# EAGLE board hexapod_mk2_v0.0 (EAGLE 9.6.2)
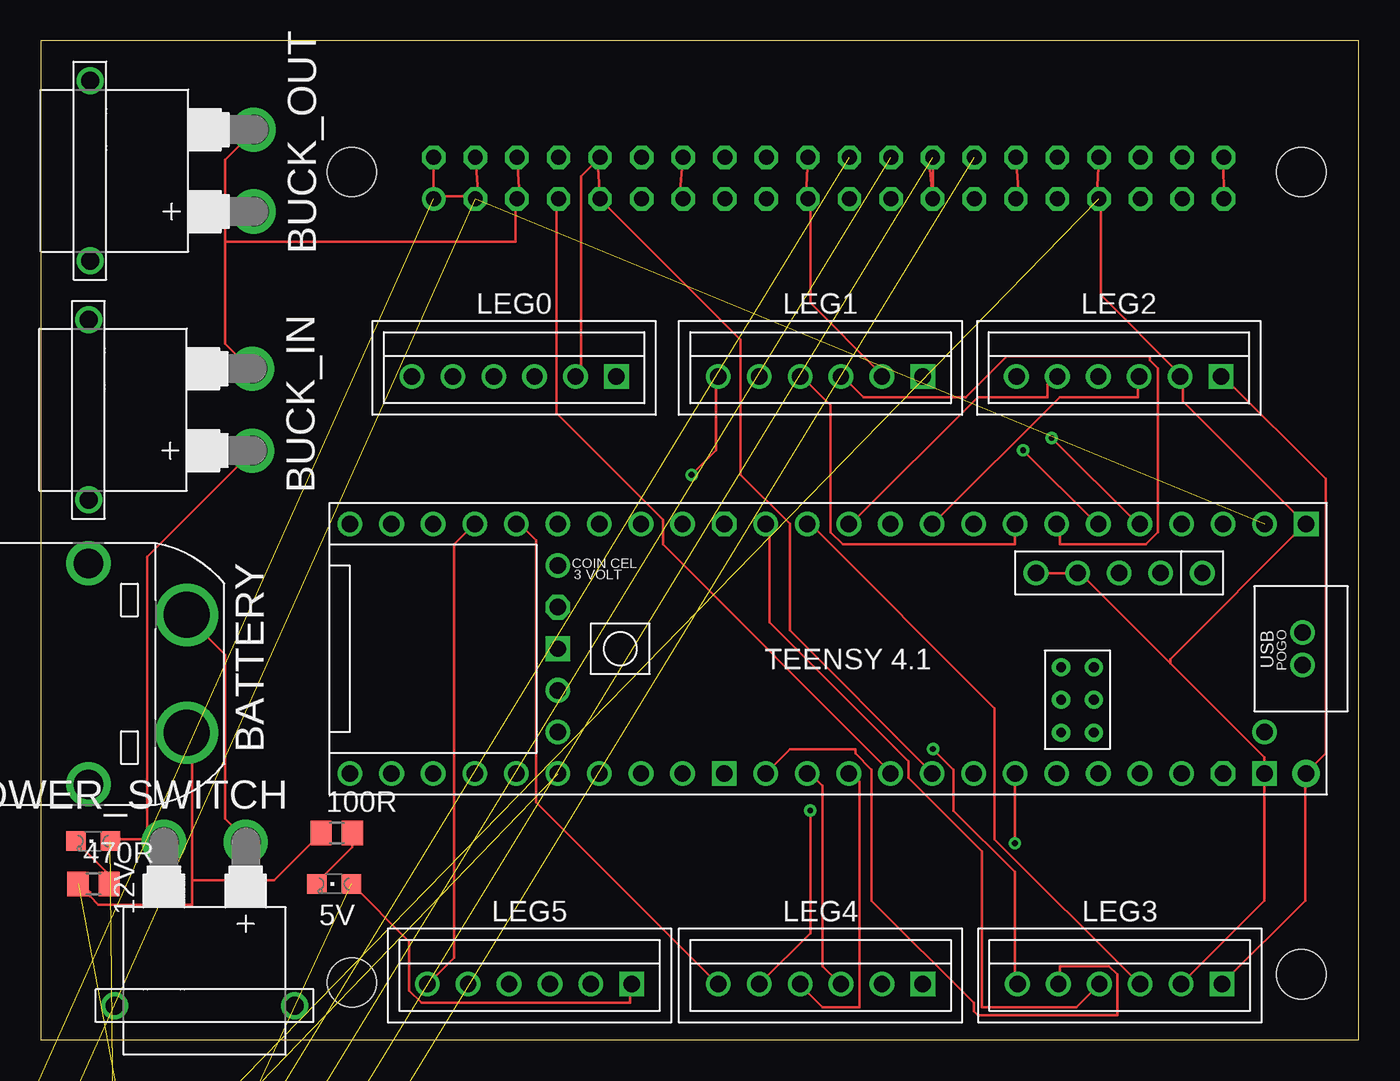
[diagram p0: board, top side]
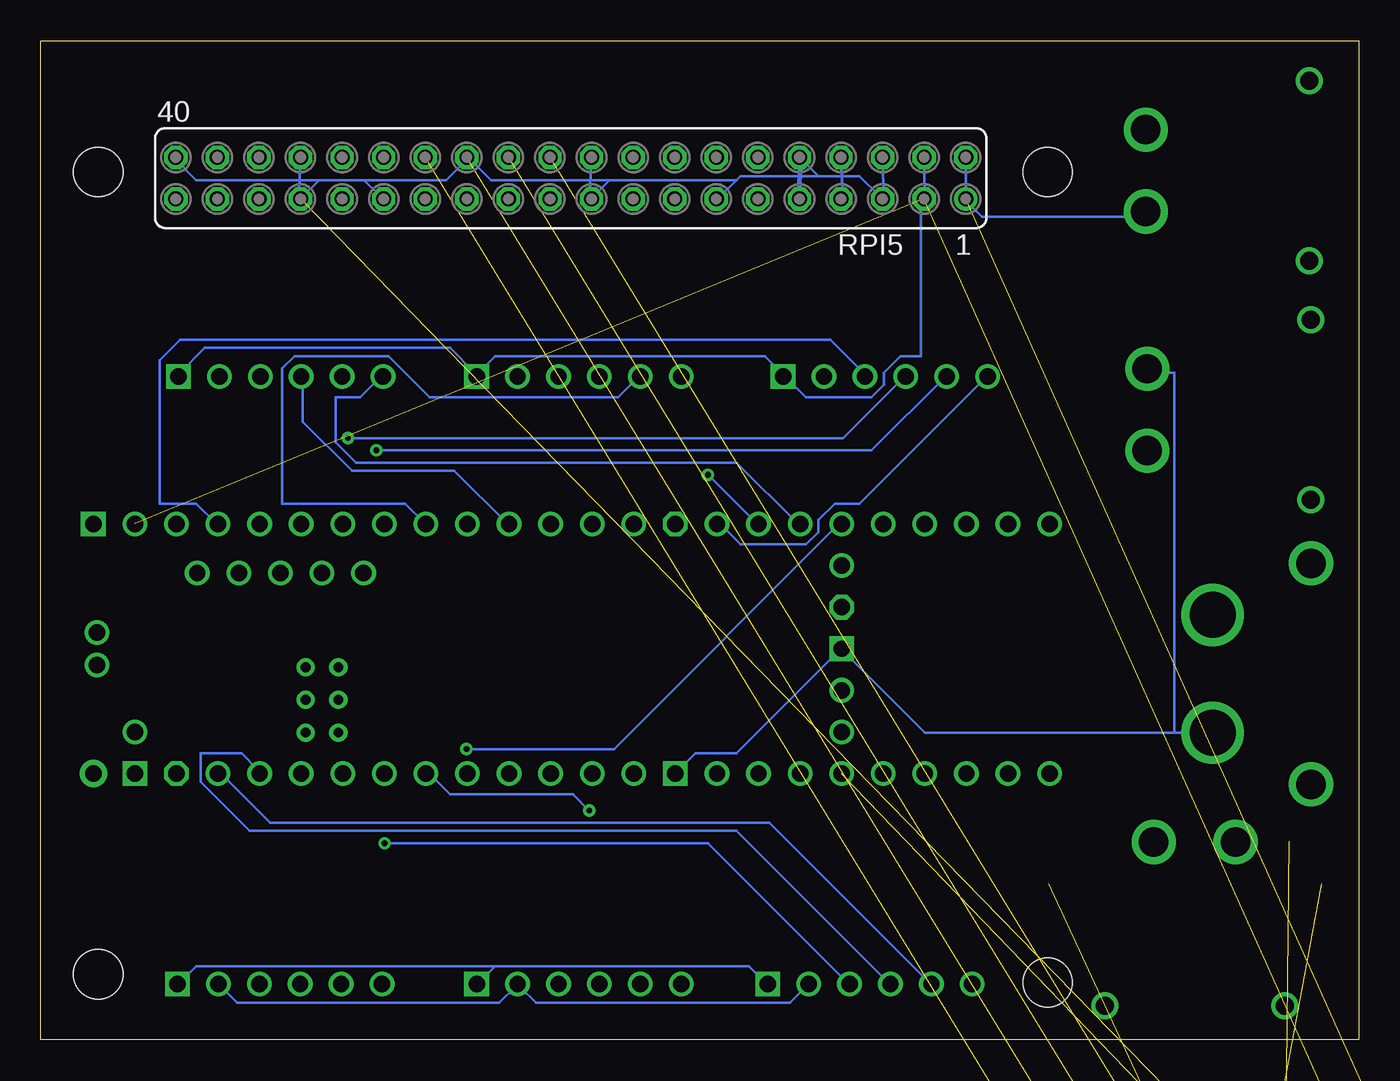
[diagram p1: board, bottom side, seen from below]

Size 80.5 x 61 mm. Coordinates in mm from the lower left corner, seen from the top.
Outline: 0,0 80.5,0 80.5,61 0,61 0,0
Copper layers (1*16): Top 0.035mm / dielectric 1.5mm / Bottom 0.035mm
Design rules "default": minimum track width 6mil, minimum drill 0.35mm, track to track 6mil, track to pad 6mil, pad to pad 6mil, via to via 6mil, smd to smd 6mil, copper to edge 40mil, drill to drill 6mil, minimum pad ring 10mil, minimum via ring 8mil, stop-mask expansion 4mil, vias tented up to drill 0mil, thermal gap 10mil
Net classes: 0 default: clearance 0.205 mm
Holes 3 mm at 19,53 19,3.5 77,53 77,4

## Footprints (pad centres in the part's own frame; a part is rotated, then mirrored left to right if it is on the bottom)
CHIPLED_0805 = smd 1.2 x 1.2: A 0,-1.05; C 0,1.05
R0805 = smd 1.3 x 1.5: 1 -0.95,0; 2 0.95,0
XT60PW-M = drill 2.8: + 3.6,0; - -3.6,0 | drill 1.8: P$3 -6.75,6; P$4 6.75,6
XT30PW-M = drill 1.8: + -2.5,0; - 2.5,0 | drill 1.1: P$3 -5.5,10; P$4 5.5,10
B3B-XH = drill 1 square: P$1 2.5,0 | drill 1: P$2 0,0; P$3 -2.5,0
B6B-XH = drill 1 square: P$1 6.25,0 | drill 1: P$2 3.75,0; P$3 1.25,0; P$4 -1.25,0; P$5 -3.75,0; P$6 -6.25,0
MPM_VIS = smd 0.584 x 0.965: 1 -1.003,-1.118; 2 1.003,-1.118; 3 0,1.118
FE20-2 = drill 0.914: 1 -24.13,1.27 | drill 0.914 octagon: 2 -24.13,-1.27; 3 -21.59,1.27; 4 -21.59,-1.27; 5 -19.05,1.27; 6 -19.05,-1.27; 7 -16.51,1.27; 8 -16.51,-1.27; 9 -13.97,1.27; 10 -13.97,-1.27; 11 -11.43,1.27; 12 -11.43,-1.27; 13 -8.89,1.27; 14 -8.89,-1.27; 15 -6.35,1.27; 16 -6.35,-1.27; 17 -3.81,1.27; 18 -3.81,-1.27; 19 -1.27,1.27; 20 -1.27,-1.27; 21 1.27,1.27; 22 1.27,-1.27; 23 3.81,1.27; 24 3.81,-1.27; 25 6.35,1.27; 26 6.35,-1.27; 27 8.89,1.27; 28 8.89,-1.27; 29 11.43,1.27; 30 11.43,-1.27; 31 13.97,1.27; 32 13.97,-1.27; 33 16.51,1.27; 34 16.51,-1.27; 35 19.05,1.27; 36 19.05,-1.27; 37 21.59,1.27; 38 21.59,-1.27; 39 24.13,1.27; 40 24.13,-1.27
SMS-004 = smd 1.092 x 2.007: 1 -3.81,-4.496; 2 -1.27,-4.496; 3 1.27,-4.496; 4 3.81,-4.496; 5 3.81,4.496; 6 1.27,4.496; 7 -1.27,4.496; 8 -3.81,4.496
TEENSY41 = drill 1: 0-RX1/CS1/CRX2 -27.94,-7.62; 1-TX1/MISO1/CTX2 -25.4,-7.62; 2-OUT2 -22.86,-7.62; 3-LRCLK2 -20.32,-7.62; 4-BCLK2 -17.78,-7.62; 5-IN2 -15.24,-7.62; 6-OUT1D -12.7,-7.62; 7-RX2/OUT1A -10.16,-7.62; 8-TX2/IN2 -7.62,-7.62; 9-OUT1C -5.08,-7.62; 10-CS\MQSR -2.54,-7.62; 11-MOSI/CTX1 0,-7.62; 12-MISO/MQSL 2.54,-7.62; 13-SCK/LED 2.54,7.62; 14-A0/TX3/SPDIF_OUT 0,7.62; 15-A1/RX3/SPDIF_IN -2.54,7.62; 16-A2/RX4/SCL1 -5.08,7.62; 17-A3/TX4/SDA1 -7.62,7.62; 18-A4/SDA0 -10.16,7.62; 19-A5/SCL0 -12.7,7.62; 20-A6/TX5/LRCLK1 -15.24,7.62; 21-A7/RX5/BCLK1 -17.78,7.62; 22-A8/CTX1 -20.32,7.62; 23-A9/CRX1/MCLK1 -22.86,7.62; 24-A10/TX6/SCL2 7.62,-7.62; 25-A11/RX6/SDA2 10.16,-7.62; 26-A12/MOSI1 12.7,-7.62; 27-A13/SCK1 15.24,-7.62; 28-RX7 17.78,-7.62; 29-TX7 20.32,-7.62; 30-CRX3 22.86,-7.62; 31-CTX3 25.4,-7.62; 32-OUT1B 27.94,-7.62; 33-MCLK2 27.94,7.62; 34-RX8 25.4,7.62; 35-TX8 22.86,7.62; 36-PWM 20.32,7.62; 37-PWM 17.78,7.62; 38-A14/CS/IN1 15.24,7.62; 39-A15/CS/OUT1A 12.7,7.62; 40-A16/CS1 10.16,7.62; 41-A17/MISO1 7.62,7.62; +5V -24.13,-4.62; D+ -30.25,-1; D- -30.25,1; DM -21.59,-4.62; DP -19.05,-4.62; GND4 -16.51,-4.62; GND5 -13.97,-4.62; ON/OFF 15.24,5.08; PROGRAM 15.24,2.54; VBAT 15.24,-5.08; VUSB -27.94,5.08 | drill 1 octagon: 3V3-1 5.08,-7.62; 3V3-2 15.24,-2.54; 3V3-3 -25.4,7.62 | drill 0.6: G -15.51,3.12; LED -17.51,3.12; R+ -17.51,5.12; R- -15.51,5.12; T+ -15.51,1.12; T- -17.51,1.12 | drill 1 square: GND1 -30.48,-7.62; GND2 15.24,0; GND3 5.08,7.62; GND6 -27.94,7.62 | drill 1 pad 1.676: VIN -30.48,7.62
JST-XH-02-PACKAGE-LONG-PAD = drill 1.016 long: 1 -1.27,0; 2 1.27,0

## Placement (x,y rotation side)
5V  Red  [CHIPLED_0805]  17.91,9.52 90 top
12V  Blue  [CHIPLED_0805]  3.19,12.13 90 top
100R  100  [R0805]  18.07,12.63 0 top
470R  470  [R0805]  3.22,9.52 0 top
BATTERY  XT60PW-M  [XT60PW-M]  8.91,22.35 90 top
BUCK_IN  XT30PW-M  [XT30PW-M]  12.91,38.48 90 top
BUCK_OUT  XT30PW-M  [XT30PW-M]  13,53.08 90 top
LED_RING  03-JST-B3B-XH-A  [B3B-XH]  -15,-33 0 top  (outside the outline)
LEG0  06-JST-B6B-XH-A  [B6B-XH]  28.91,40.51 0 top
LEG1  06-JST-B6B-XH-A  [B6B-XH]  47.63,40.51 0 top
LEG2  06-JST-B6B-XH-A  [B6B-XH]  65.85,40.51 0 top
LEG3  06-JST-B6B-XH-A  [B6B-XH]  65.91,3.4 0 top
LEG4  06-JST-B6B-XH-A  [B6B-XH]  47.63,3.4 0 top
LEG5  06-JST-B6B-XH-A  [B6B-XH]  29.85,3.4 0 top
POWER_SWITCH  XT30PW-M  [XT30PW-M]  10.01,12.08 180 top
R1  MPMT10014001AT1MPM_VIS  [MPM_VIS]  5.5,-12 0 top  (outside the outline)
RPI5  Raspberry Pi  [FE20-2]  48.13,52.62 180 bottom
S1  SWS004  [SMS-004]  -2,-32 0 top  (outside the outline)
U$1  TEENSY41  [TEENSY41]  46.82,23.88 180 top
X1  JST-XH-02-PIN-LONG-PAD  [JST-XH-02-PACKAGE-LONG-PAD]  -17,-43 0 top  (outside the outline)

## Library data of the parts
5V 12V = led
100R 470R = rcl; SPICEPREFIX: R
BATTERY BUCK_IN BUCK_OUT POWER_SWITCH = amass
LED_RING LEG0 LEG1-LEG5 = bt_con-jst-xh
R1 = MPMT10014001AT1; COPYRIGHT: Copyright (C) 2024 Ultra Librarian. All rights reserved.; MANUFACTURER_PART_NUMBER: MPMT10014001AT1; MFR_NAME: Vishay
RPI5 = con-lsta; OC_FARNELL: unknown; OC_NEWARK: unknown
S1 = smd-special
U$1 = teensy
X1 = Rembrandt Electronics - JST XH Connectors v1-0

## Nets
3.3V: RPI5.1 X1.1
5V: 5V.A BUCK_OUT.+ LED_RING.P$1 LEG0.P$1 LEG1.P$1 LEG2.P$1 LEG3.P$1 LEG4.P$1 LEG5.P$1 RPI5.2 RPI5.4 S1.5 S1.6 S1.7 S1.8 U$1.VIN
12V: 12V.A BUCK_IN.+ POWER_SWITCH.- R1.1
12V_PRE: BATTERY.+ POWER_SWITCH.+
D_SW0: RPI5.22 S1.1
D_SW1: RPI5.24 S1.2
D_SW2: RPI5.26 S1.3
D_SW3: RPI5.28 S1.4
GND: 100R.1 470R.1 BATTERY.- BUCK_IN.- BUCK_OUT.- LED_RING.P$2 LEG0.P$2 LEG1.P$2 LEG2.P$2 LEG3.P$2 LEG4.P$2 LEG5.P$2 R1.2 RPI5.6 RPI5.9 RPI5.14 RPI5.20 RPI5.25 RPI5.30 RPI5.34 RPI5.39 U$1.GND1 U$1.GND2 U$1.GND3 U$1.GND4 U$1.GND5 U$1.GND6
L0M1: LEG0.P$3 U$1.2-OUT2
L0M2: LEG0.P$4 U$1.3-LRCLK2
L0M3: LEG0.P$5 U$1.4-BCLK2
L0SIG: LEG0.P$6 U$1.24-A10/TX6/SCL2
L1M1: LEG1.P$3 U$1.5-IN2
L1M2: LEG1.P$4 U$1.6-OUT1D
L1M3: LEG1.P$5 U$1.7-RX2/OUT1A
L1SIG: LEG1.P$6 U$1.25-A11/RX6/SDA2
L2M1: LEG2.P$3 U$1.8-TX2/IN2
L2M2: LEG2.P$4 U$1.9-OUT1C
L2M3: LEG2.P$5 U$1.10-CS\MQSR
L2SIG: LEG2.P$6 U$1.26-A12/MOSI1
L3M1: LEG3.P$3 U$1.11-MOSI/CTX1
L3M2: LEG3.P$4 U$1.12-MISO/MQSL
L3M3: LEG3.P$5 U$1.13-SCK/LED
L3SIG: LEG3.P$6 U$1.27-A13/SCK1
L4M1: LEG4.P$3 U$1.14-A0/TX3/SPDIF_OUT
L4M2: LEG4.P$4 U$1.15-A1/RX3/SPDIF_IN
L4M3: LEG4.P$5 U$1.18-A4/SDA0
L4SIG: LEG4.P$6 U$1.28-RX7
L5M1: LEG5.P$3 U$1.19-A5/SCL0
L5M2: LEG5.P$4 U$1.22-A8/CTX1
L5M3: LEG5.P$5 U$1.23-A9/CRX1/MCLK1
L5SIG: LEG5.P$6 U$1.29-TX7
LEDSIG: LED_RING.P$3 RPI5.33
N$1: 5V.C 100R.2
N$2: 12V.C 470R.2
PWRSIG: RPI5.3 U$1.0-RX1/CS1/CRX2 X1.2
RPI_RX: RPI5.10 U$1.17-A3/TX4/SDA1
RPI_TX: RPI5.8 U$1.16-A2/RX4/SCL1
V_DIV: R1.3 U$1.38-A14/CS/IN1

## Tracks (layer width: path | path; a pad name or v marks a point on that pad's centre or on a via)
3.3V  (1 unrouted)
5V  (via drill 0.35)  (5 unrouted)
  Top 0.152: LEG3.P$1 72.25,3.5 77.25,8.5 77.25,16.25 U$1.VIN 77.5,16.5 78.5,17.5 78.5,34.25 72.25,40.5 LEG2.P$1 | 5V.A 19,9.5 22.5,6 22.5,3 23.25,2.25 36,2.25 36,3.25 LEG5.P$1 | v26.5,51.5 v24,51.5 | v24,51.25 RPI5.2 | v26.75,51.25 RPI5.4
  Bottom 0.152: 52.75,4.5 53.75,3.5 LEG4.P$1 | 52.75,4.5 37.25,4.5 36.25,3.5 LEG5.P$1 | 52.75,4.5 71,4.5 72,3.5 LEG3.P$1 | v24,51.5 RPI5.2 | v26.5,51.5 RPI5.4 | v24,51.25 23,50.25 13.25,50.25 13,50.5 BUCK_OUT.+ | LEG2.P$1 72,40.75 70.5,42.25 55.5,42.25 54,40.75 LEG1.P$1 53.75,40.75 52.75,41.75 36.25,41.75 35.25,40.75 LEG0.P$1 35,40.5 33.75,39.25 29.75,39.25 29,40 29,40.75 28,41.75 26.75,41.75 v26.75,51.25
12V  (1 unrouted)
  Top 0.152: 6.5,12.25 7.5,12.25 POWER_SWITCH.- 6.5,12.25 | 6.5,12.25 4.25,12.25 12V.A | 6.5,12.25 6.5,29.5 12.75,35.75 BUCK_IN.+
12V_PRE
  Top 0.152: POWER_SWITCH.+ 12.5,12.25 11.25,13.5 11.25,23.5 9,25.75 BATTERY.+
D_SW0  (1 unrouted)
D_SW1  (1 unrouted)
D_SW2  (1 unrouted)
D_SW3  (1 unrouted)
GND  (via drill 0.35)  (2 unrouted)
  Top 0.152: 77.25,31.5 69.75,39 69.75,40.5 LEG2.P$2 69.5,40.75 64.75,45.5 v64.75,51.25 | U$1.GND5 U$1.GND4 63.5,28.5 69,23 | LEG3.P$2 69.75,3.5 74.75,8.5 U$1.GND6 74.75,16.5 74.75,17.25 69,23 | 77.25,31.5 69,23.25 69,23 | 77.25,31.5 U$1.GND1 | 9.25,9.75 9.25,18.5 9,18.75 BATTERY.- | 9.25,9.75 9.25,8.25 3.5,8.25 3,8.75 3,9 2.5,9.5 470R.1 | 9.25,9.75 14.25,9.75 17,12.5 100R.1 | 11.25,48.75 11.25,53.75 13,55.5 BUCK_OUT.- | 11.25,48.75 11.25,42.5 12.75,41 BUCK_IN.- | v59.75,51.5 RPI5.30 | v64.5,51.5 RPI5.34 | v54.5,53.75 RPI5.25 v54.25,53.75 | v72.25,53.75 RPI5.39 | v29.25,51.5 RPI5.6 | RPI5.9 34,53.75 33,52.75 33,41 32.75,40.75 LEG0.P$2 | v39,51.5 RPI5.14 | v46.75,51.5 RPI5.20 | v47,51.25 47,45 51.25,40.75 LEG1.P$2 | 11.25,48.75 29,48.75 v29,51.25
  Bottom 0.152: LEG5.P$2 34.75,2.25 50.25,2.25 51.25,3.25 LEG4.P$2 51.5,3.25 52.5,2.25 68.5,2.25 69.5,3.25 LEG3.P$2 | U$1.GND3 40.5,17.5 38,17.5 31.75,23.75 U$1.GND2 31.5,23.75 26.5,18.75 11.25,18.75 | BATTERY.- 11.25,18.75 | 60.75,52.5 v59.75,51.5 | 63.5,52.5 60.75,52.5 | v64.5,51.5 63.5,52.5 | v54.5,53.75 55.75,52.5 60.75,52.5 | v72.25,53.75 71,52.5 63.5,52.5 | v29.25,51.5 30.5,52.75 33,52.75 | 33,52.75 34,53.75 RPI5.9 | 38,52.5 37.75,52.75 33,52.75 | 38,52.5 v39,51.5 | 45.75,52.5 v46.75,51.5 | 38,52.5 45.75,52.5 | v47,51.25 RPI5.20 | v54.25,53.75 53,52.5 45.75,52.5 | v29,51.25 RPI5.6 | 11.25,18.75 11.25,40.75 12.75,40.75 BUCK_IN.- | v64.75,51.25 RPI5.34
L0M1
  Bottom 0.152: LEG0.P$3 30.25,40.75 32.25,42.75 72,42.75 73.25,41.5 73.25,32.75 71,32.75 69.75,31.5 U$1.2-OUT2
L0M2  (via drill 0.35)
  Top 0.152: v61.75,36.75 67,31.5 U$1.3-LRCLK2
  Bottom 0.152: v61.75,36.75 31.5,36.75 27.75,40.5 LEG0.P$4
L0M3  (via drill 0.35)
  Top 0.152: v60,36 64.5,31.5 U$1.4-BCLK2
  Bottom 0.152: v60,36 29.75,36 25.25,40.5 LEG0.P$5
L0SIG
  Bottom 0.152: LEG0.P$6 22.75,40.5 30.5,32.75 32,32.75 33,31.75 33,31 33.75,30.25 37.75,30.25 39,31.5 U$1.24-A10/TX6/SCL2
L1M1
  Top 0.152: LEG1.P$3 49,40.5 50.25,39.25 56.5,39.25 59,41.75 67.75,41.75 67.75,41.5 68.25,41 68.25,31 67.5,30.25 62.25,30.25 62.25,31.5 U$1.5-IN2
L1M2
  Top 0.152: LEG1.P$4 46.5,40.5 48.25,38.75 48.25,31 49,30.25 59.5,30.25 59.5,31.5 U$1.6-OUT1D
L1M3
  Bottom 0.152: LEG1.P$5 44,40.5 45.25,39.25 56.75,39.25 59.25,41.75 65,41.75 65.75,41 65.75,32.75 58.25,32.75 57,31.5 U$1.7-RX2/OUT1A
L1SIG  (via drill 0.35)
  Top 0.152: v39.75,34.5 41.25,36 41.25,40.5 LEG1.P$6
  Bottom 0.152: v39.75,34.5 36.75,31.5 U$1.25-A11/RX6/SDA2
L2M1
  Top 0.152: U$1.8-TX2/IN2 54.5,31.5 62.25,39.25 67,39.25 67,40.5 LEG2.P$3
L2M2
  Bottom 0.152: U$1.9-OUT1C 52,31.5 55.25,34.75 61.5,34.75 64.5,37.75 64.5,40.5 LEG2.P$4
L2M3
  Top 0.152: U$1.10-CS\MQSR 49.5,31.5 57.25,39.25 61.5,39.25 61.5,40 62,40.5 LEG2.P$5
L2SIG
  Bottom 0.152: U$1.26-A12/MOSI1 34.25,31.5 38,35.25 61.25,35.25 62.5,36.5 62.5,39.25 61,39.25 59.75,40.5 LEG2.P$6
L3M1
  Top 0.152: LEG3.P$3 67,3.5 58.25,12.25 58.25,20.25 47,31.5 U$1.11-MOSI/CTX1
L3M2
  Top 0.152: LEG3.P$4 64.5,3.25 63.25,2 57.5,2 57.5,11.5 53,16 53,17 44.5,25.5 44.5,31.5 U$1.12-MISO/MQSL
L3M3
  Top 0.152: U$1.13-SCK/LED 44.5,16.5 45.75,17.75 49.75,17.75 49.75,17.5 50.75,16.5 50.75,8.5 57,2.25 57,1.75 57.25,1.5 65.75,1.5 65.75,4 65.25,4.5 62.25,4.5 62.25,3.5 LEG3.P$5
L3SIG  (via drill 0.35)
  Top 0.152: v54.5,17.75 55.75,16.5 55.75,14 59.5,10.25 59.5,3.5 LEG3.P$6
  Bottom 0.152: v54.5,17.75 45.5,17.75 31.75,31.5 U$1.27-A13/SCK1
L4M1
  Top 0.152: LEG4.P$3 48.75,3.5 47.75,4.5 47.75,15.5 47,16.25 U$1.14-A0/TX3/SPDIF_OUT
L4M2
  Top 0.152: LEG4.P$4 46.5,3.25 47.75,2 50,2 50,15.75 49.5,16.25 U$1.15-A1/RX3/SPDIF_IN
L4M3  (via drill 0.35)
  Top 0.152: v47,14 47,6.5 44,3.5 LEG4.P$5
  Bottom 0.152: v47,14 48,15 55.5,15 56.75,16.25 U$1.18-A4/SDA0
L4SIG
  Top 0.152: LEG4.P$6 41.25,3.5 30.25,14.5 30.25,30.5 29.25,31.5 U$1.28-RX7
L5M1  (via drill 0.35)
  Top 0.152: v59.5,12 59.5,16.25 U$1.19-A5/SCL0
  Bottom 0.152: v59.5,12 39.75,12 31.25,3.5 LEG5.P$3
L5M2
  Bottom 0.152: LEG5.P$4 28.75,3.5 38,12.75 67.75,12.75 70.75,15.75 70.75,17.5 68.25,17.5 67.25,16.5 U$1.22-A8/CTX1
L5M3
  Bottom 0.152: LEG5.P$5 26.25,3.5 36,13.25 66.5,13.25 69.5,16.25 U$1.23-A9/CRX1/MCLK1
L5SIG
  Top 0.152: U$1.29-TX7 25.25,30.25 25.25,5 23.75,3.5 LEG5.P$6
LEDSIG  (1 unrouted)
N$1
  Top 0.152: 5V.C 17,9.75 19,11.75 19,12.5 100R.2
N$2
  Top 0.152: 12V.C 2.25,12 4,10.25 4,9.75 470R.2
PWRSIG  (2 unrouted)
RPI_RX  (via drill 0.35)
  Top 0.152: v34.25,51.25 42.75,42.75 42.75,34.5 45.75,31.5 45.75,25 54.25,16.5 U$1.17-A3/TX4/SDA1
  Bottom 0.152: v34.25,51.25 RPI5.10
RPI_TX  (via drill 0.35)
  Top 0.152: v31.5,51.25 31.5,38.25 38,31.75 38,30.25 51.75,16.5 U$1.16-A2/RX4/SCL1
  Bottom 0.152: v31.5,51.25 RPI5.8
V_DIV  (1 unrouted)